# Altium PCB AC-Power-Monitor.PcbDoc (part 3 of 3)
Units mm, origin at the board's own origin, x right, y up, seen from the top; angles counter-clockwise.
Board outline 94 x 57 mm, 4 copper layers (Top Layer, N / GND, L / VCC, Bottom Layer), stack 0.673 mm thick; 70 components, 59 nets, 252 pads, 596 vias.
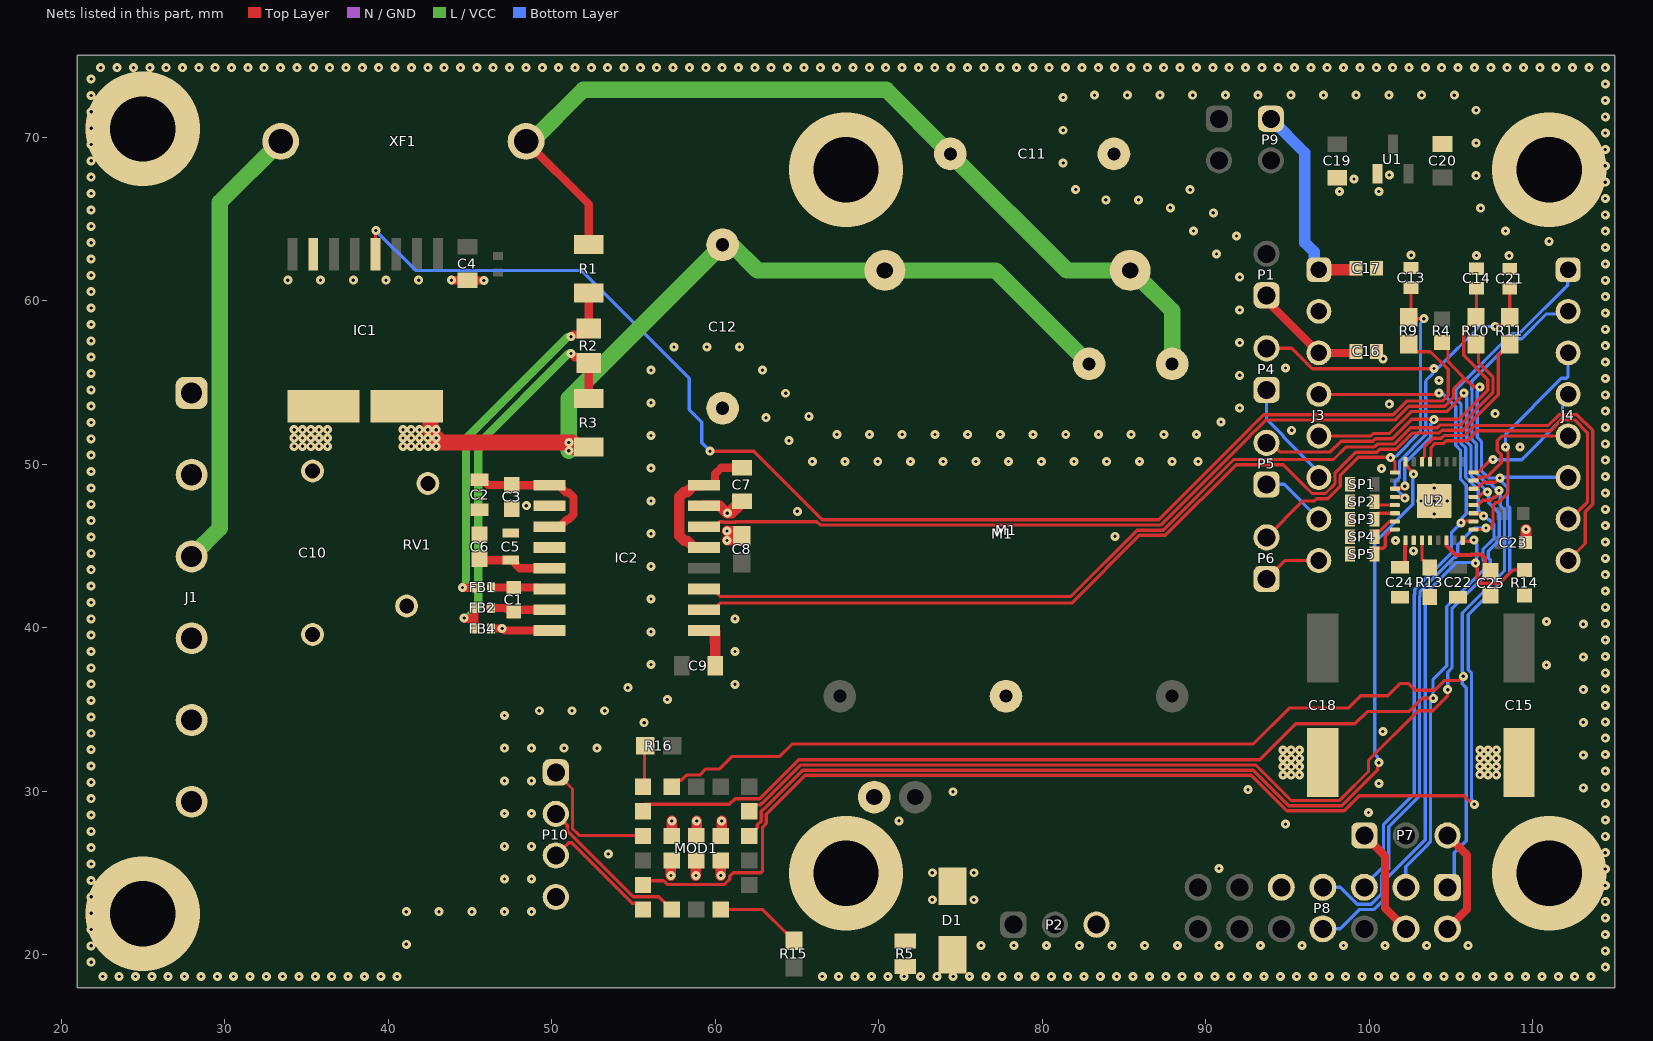
[diagram p4: the nets of this part, all layers, seen from the top]

## Via types
v1: diameter 0.55, hole 0.2, Top Layer to Bottom Layer, 445 vias
v2: diameter 0.55, hole 0.2, Top Layer to Bottom Layer, tented both sides, 145 vias
v3: diameter 7, hole 4, Top Layer to Bottom Layer, 6 vias

## Nets (pads, with @x,y where several pads share a name; then routed paths per layer and width w, separated by ;. In a path a pad name is that pad's centre, name@x,y a point inside that pad or via, vN(x,y) a via of type N, cw(c..) or ccw(c..) an arc to the next point about the centre after c; other vN are vias at no path point) (continued)
A0P: C13.1 P6.2 R9.2 U2.1 | length 23.3
  Top Layer w0.2: P6.2@93.718,45.528 95.942,47.752 96.647,47.752 96.784,47.889 97.453,47.889 98.215,48.651 98.215,49.32 99.314,50.419 101.27,50.419 v1(101.29,50.4) ; v1@101.32,50.36 101.573,50.108 U2.1@101.573,49.51 ; C13.1@102.552,60.797 102.552,59.115 R9.2@102.411,58.973 102.488,58.896 v1(103.332,58.896)
  Bottom Layer w0.2: v1(101.29,50.4) 101.357,50.467 101.604,50.467 103.124,51.987 103.124,58.604 103.332,58.812 v1(103.332,58.896)
A1N: C21.1 P4.2 R11.2 U2.4 | length 28.2
  Top Layer w0.2: P4.2@93.718,57.088 95.25,57.088 96.509,55.829 103.929,55.829 v1(103.955,55.855) ; U2.4@101.565,48.002 101.59,47.977 102.113,47.977 v1(102.167,47.923) ; v1(107.696,58.42) 107.791,58.42 107.877,58.506 108.154,58.506 108.585,58.937 R11.2@108.585,58.973 ; R11.2@108.585,59.01 C21.1@108.585,60.741
  Bottom Layer w0.2: v1(102.167,47.923) 102.167,47.954 101.575,48.546 101.575,48.945 101.847,49.217 101.847,50.193 103.444,51.79 103.444,55.045 103.465,55.066 103.465,55.122 103.888,55.545 103.888,55.788 104.022,55.922 104.24,55.922 106.738,58.42 v1(107.696,58.42)
A1P: C14.1 P5.2 R10.2 U2.3 | length 27.9
  Top Layer w0.2: P5.2@93.718,51.308 93.976,51.308 94.535,50.749 97.612,50.749 98.272,51.409 100.217,51.409 100.359,51.552 101.391,51.552 102.595,52.755 103.912,52.755 v1(103.942,52.726) ; U2.3@101.565,48.502 101.59,48.527 101.945,48.527 102.072,48.655 v1(102.167,48.655) ; v1@103.942,52.755 105.484,52.755 107.248,54.519 107.248,55.176 105.772,56.652 105.772,58.186 106.523,58.937 R10.2@106.523,58.973 ; R10.2@106.555,59.006 106.555,59.934 C14.1@106.555,60.759
  Bottom Layer w0.2: v1(102.167,48.655) 102.167,50.061 103.764,51.658 103.764,52.454 103.942,52.631 v1(103.942,52.726)
A2N: SP3.2 U2.6 | length 1.4
  Top Layer w0.16: SP3.2@100.318,46.736 100.318,46.802 SP3.2@100.338,46.822
  Top Layer w0.2: SP3.2@100.338,46.822 100.518,47.002 U2.6@101.565,47.002
A2P: SP2.2 U2.5 | length 1.4
  Top Layer w0.16: SP2.2@100.318,47.752 SP2.2@100.318,47.702 SP2.2@100.338,47.682
  Top Layer w0.2: SP2.2@100.338,47.682 100.518,47.502 U2.5@101.565,47.502
A3N: SP5.2 U2.8 | length 1.9
  Top Layer w0.2: SP5.2@100.509,44.85 100.513,44.854 100.863,44.854 100.98,44.971 100.98,45.608 101.349,45.977 101.54,45.977 U2.8@101.565,46.002
A3P: SP4.2 U2.7 | length 1.5
  Top Layer w0.2: SP4.2@100.318,45.866 100.372,45.92 100.663,45.92 101.22,46.477 101.54,46.477 U2.7@101.565,46.502
BOOT_CTRL0: MOD1.17 R15.1 | length 5.3
  Top Layer w0.2: MOD1.17@60.34,22.77 62.917,22.77 64.352,21.336 64.388,21.336 64.819,20.905 R15.1@64.819,20.868
BOOT_CTRL1: MOD1.9 R16.1 | length 2.1
  Top Layer w0.2: MOD1.9@55.678,30.7 55.678,32.721 R16.1@55.738,32.781
ESP_+3.3V: C16.2 J3.3 P1.1 | length 7.2
  Top Layer w0.5: P1.1@93.718,60.328 93.718,60.03 94.153,59.595 94.153,59.571 J3.3@96.915,56.809 99.11,56.809 C16.2@99.197,56.896
ESP_+5.0V: C17.2 J3.1 P9.1 | length 12.8
  Top Layer w0.7: J3.1@96.915,61.889 99.147,61.889 99.197,61.939 C17.2@99.197,61.976
  Bottom Layer w0.7: P9.1@93.98,71.12 96.064,69.036 96.064,63.542 96.625,62.982 96.625,62.179 J3.1@96.915,61.889
ESP_A0P: J3.8 P6.1 | length 3.7
  Top Layer w0.2: P6.1@93.718,42.988 94.839,44.109 J3.8@96.915,44.109
ESP_A1N: J3.6 P4.1 | length 6.7
  Bottom Layer w0.2: P4.1@93.718,54.548 93.718,52.75 94.738,51.73 94.738,51.693 96.915,49.516 J3.6@96.915,49.189
ESP_A1P: J3.7 P5.1 | length 4.1
  Bottom Layer w0.2: P5.1@93.718,48.768 94.796,48.768 J3.7@96.915,46.649
ESP_GPIO20: J4.7 U2.29 | length 17.3
  Top Layer w0.2: U2.29@103.715,50.152 103.74,50.177 103.74,50.431 103.772,50.463 103.772,51.005 104.038,51.271 104.544,51.271 104.708,51.435 105.974,51.435 106.588,52.049 111.089,52.049 111.749,52.709 112.561,52.709 113.334,51.936 113.334,47.675 112.308,46.649 J4.7@112.155,46.649
ESP_GPIO21: J4.8 U2.30 | length 21.1
  Top Layer w0.2: U2.30@103.215,50.152 103.215,50.327 103.24,50.352 103.253,50.352 103.37,50.469 103.37,51.056 103.905,51.591 104.412,51.591 104.576,51.755 105.841,51.755 106.456,52.369 110.957,52.369 111.617,53.029 112.693,53.029 113.654,52.068 113.654,47.543 113.199,47.087 113.199,45.153 J4.8@112.155,44.109
GND: C4.1 C7.1 C8.2 C9.1 C11.2 C12.2 C13.2 C14.2 C15.2 C16.1 C17.1 C18.2 C19.1 C20.1 C21.2 C22.1 C23.1 C24.1 C25.2 D1.2 IC1.9 IC2.9 IC2.15 J3.2 M1.4 MOD1.B1 MOD1.B2 MOD1.B3 MOD1.B4 MOD1.B5 MOD1.B6 P2.3 P8.9 P10.4 R5.2 R13.1 R14.1 SP1.1 SP2.1 SP3.1 SP4.1 SP5.1 U1.1 U2.10 U2.12 U2.33 | length 17.3
  Top Layer w0.5: v2(43.872,61.256) 43.881,61.247 44.868,61.247 44.876,61.239 v1(45.851,61.239)
  Top Layer w0.65: v1(57.293,24.848) 57.293,25.724 MOD1.B5@57.34,25.77 ; MOD1.B4@57.34,27.27 57.345,27.276 v1(57.345,28.186) ; v1(58.822,24.848) 58.822,25.753 MOD1.B6@58.84,25.77 ; MOD1.B3@58.84,27.27 58.84,27.42 58.865,27.445 58.865,28.182 v1(58.869,28.186) ; IC2.9@58.945,39.829 IC2.9@59.31,39.829 59.916,39.829 59.991,39.754 59.991,39.149 60.003,39.137 C9.1@60.003,37.671 ; IC2.15@59.31,47.449 60.276,47.449 60.723,47.002 61.012,47.002 C7.1@61.458,47.449 ; MOD1.B1@60.34,25.77 60.346,25.764 v1(60.346,24.848) ; MOD1.B2@60.34,27.27 60.34,27.386 60.398,27.445 v1(60.398,28.186) ; v1(60.73,45.34) 60.732,45.341 61.429,45.341 C8.2@61.638,45.55 ; v1(60.73,45.912) 60.745,45.898 61.429,45.898 C8.2@61.638,45.689 ; v1@60.784,47.002 61.36,47.579 61.485,47.579 C7.1@61.638,47.732 ; C14.2@106.555,61.959 C14.2@106.557,61.961 ; C21.2@108.555,61.971 C21.2@108.585,61.941 ; C23.1@109.541,45.212 109.541,45.249 109.579,45.287 v1(109.579,46.02)
  other v1: 73.279,23.368 75.819,23.368 73.279,25.019 75.819,25.019 53.467,26.162 94.716,30.998 95.219,30.998 95.727,30.998 106.758,31.013 107.258,31.008 107.766,31.008 94.716,31.506 95.219,31.506 95.727,31.506 106.758,31.516 107.258,31.516 107.766,31.516 94.716,32.014 95.219,32.014 95.727,32.014 106.758,32.024 107.258,32.024 107.766,32.024 94.716,32.522 95.219,32.522 95.727,32.522 106.769,32.512 107.258,32.532 107.766,32.532 102.707,44.704 101.6,45.339 103.965,46.952 60.746,47.002 103.165,47.752 103.965,47.752 104.765,47.752 103.965,48.552 100.741,49.729 109.22,51.054 95.25,52.07 107.696,53.086 101.219,53.674 104.267,55.118 94.869,55.88 100.847,56.446 106.557,62.761 108.555,62.751 102.563,62.781 98.171,66.675 100.584,66.675 99.06,67.437 101.219,67.691
  other v2: 76.265,20.574 78.265,20.574 80.265,20.574 82.265,20.574 84.265,20.574 86.265,20.574 88.265,20.574 90.805,20.574 93.345,20.574 95.885,20.574 98.425,20.574 100.965,20.574 103.505,20.574 106.045,20.574 48.768,22.639 48.768,24.639 90.805,25.273 48.768,26.639 94.869,27.989 71.247,28.194 48.768,28.639 99.949,28.702 74.549,29.972 92.583,30.099 113.084,30.216 100.584,30.48 48.768,30.639 113.084,32.216 48.768,32.639 50.768,32.639 52.768,32.639 100.825,33.655 55.66,34.197 113.084,34.216 57.075,35.612 113.084,36.216 61.214,36.544 110.834,37.719 113.084,38.216 61.214,38.544 113.084,40.216 110.834,40.386 61.214,40.544 84.455,45.593 65.024,47.117 65.942,50.169 67.942,50.169 69.942,50.169 71.942,50.169 73.942,50.169 75.942,50.169 77.942,50.169 79.942,50.169 81.942,50.169 83.942,50.169 85.942,50.169 87.942,50.169 89.535,50.165 64.516,51.435 63.102,52.849 33.872,61.256 35.872,61.256 37.872,61.256 39.872,61.256 41.872,61.256 110.998,63.627 91.873,63.956 108.331,64.262 90.458,65.371 106.807,65.659 89.044,66.785 106.536,67.644 106.536,69.644 106.536,71.644 83.199,72.565 85.199,72.565 87.199,72.565 89.199,72.565 91.199,72.565 93.199,72.565 95.199,72.565 97.199,72.565 99.199,72.565 101.199,72.565 103.199,72.565 105.199,72.565
GPIO3: J3.5 MOD1.4 U2.21 | length 79.5
  Top Layer w0.2: MOD1.4@62.09,28.77 62.479,29.16 62.724,29.16 62.794,29.23 62.848,29.23 65.23,31.613 93.04,31.613 95.21,29.444 98.191,29.444 98.32,29.573 98.32,29.582 99.949,31.21 99.949,31.888 102.986,34.925 103.886,34.925 104.776,35.815 104.776,36.204 v1(104.788,36.216) ; J3.5@96.915,51.729 100.084,51.729 100.227,51.872 101.203,51.872 102.552,53.221 104.737,53.221 105.781,54.265 v1(105.781,54.356) ; U2.21@106.365,48.002 106.39,48.027 106.716,48.027 106.919,48.229 107.15,48.229 v1(107.217,48.296)
  Bottom Layer w0.2: v1@104.788,36.311 104.788,37.278 105.049,37.539 105.049,41.167 107.398,43.516 107.398,44.151 107.277,44.272 107.277,44.682 107.947,45.352 107.947,46.993 107.295,47.645 v1@107.295,48.269 ; v1(105.781,54.356) 105.781,54.261 105.956,54.086 105.956,51.384 106.214,51.126 106.214,49.334 107.217,48.331 v1(107.217,48.296)
GPIO10: IC2.14 J4.6 MOD1.13 R4.1 U2.22 | length 146
  Top Layer w0.2: MOD1.13@55.59,24.27 55.845,24.526 56.844,24.526 57.067,24.303 60.572,24.303 60.891,24.622 60.891,24.81 61.1,25.019 62.781,25.019 62.898,25.136 62.898,27.815 63.13,28.047 63.13,28.607 65.496,30.973 92.775,30.973 94.945,28.804 98.457,28.804 98.613,28.96 99.377,29.724 105.785,29.724 106.155,29.354 106.179,29.354 106.326,29.207 v1(106.421,29.207) ; IC2.14@59.31,46.179 59.96,46.179 60.262,46.48 60.474,46.48 60.497,46.457 61.237,46.457 61.26,46.48 66.224,46.48 66.415,46.289 87.266,46.289 92.698,51.721 92.698,51.73 93.296,52.328 93.305,52.328 93.686,52.709 101.588,52.709 102.42,53.541 104.605,53.541 105.148,54.084 105.148,54.601 105.792,55.245 ; R4.1@104.442,57.443 104.445,57.443 104.813,57.075 104.813,56.265 105.148,55.929 105.812,55.265 106.346,54.731 106.747,54.731 v1(106.753,54.724) ; U2.22@106.365,48.502 106.39,48.527 106.613,48.527 106.981,48.895 107.688,48.895 107.956,49.163 v1(107.981,49.163)
  Bottom Layer w0.2: v1(106.421,29.207) 106.421,29.301 106.282,29.441 106.282,29.48 106.246,29.516 106.246,37.235 106.045,37.436 106.045,40.805 108.587,43.347 108.587,47.34 108.446,47.481 108.446,48.559 108.424,48.581 108.424,48.592 108.123,48.892 108.123,48.926 107.981,49.068 v1(107.981,49.163) ; v1(106.753,54.724) 106.753,54.63 106.596,54.472 106.596,51.649 106.854,51.391 106.854,49.599 107.291,49.163 v1(107.981,49.163) ; J4.6@112.143,49.202 108.019,49.202 v1(107.981,49.163)
HGND: C2.1 C3.2 C5.1 C6.2 FB4.2 IC2.2 IC2.8 | length 3.9
  Top Layer w0.5: C6.2@45.593,45.684 C6.2@45.692,45.783 ; C2.1@45.593,47.208 C2.1@45.656,47.271 ; FB4.2@46.283,39.954 v1(46.977,39.954) 46.991,39.954 47.116,39.829 IC2.8@49.86,39.829
  other v1: 48.453,47.466
L: C10.2 J1.3 J1.4 RV1.2 XF1.1 | length 27.6
  L / VCC w1: J1.3@27.984,44.359 29.709,46.084 29.709,53.359 29.709,55.359 29.709,66.013 XF1.1@33.434,69.738
Lfused: C11.1 M1.1 R1.2 XF1.2 | length 57.2
  Top Layer w0.5: XF1.2@48.434,69.738 52.274,65.898 R1.2@52.274,63.429
  L / VCC w1: XF1.2@48.434,69.738 48.772,69.738 51.932,72.898 70.458,72.898 C11.1@74.383,68.973 81.509,61.847 M1.1@85.377,61.847 ; M1.1@85.79,61.53 87.944,59.376 M1.1@87.944,56.134 M1.1@87.944,55.905
MOD1_RST: MOD1.3 U2.32 | length 62.5
  Top Layer w0.2: MOD1.3@62.09,27.27 62.578,27.759 62.578,27.948 62.81,28.179 62.81,28.793 62.927,28.91 62.98,28.91 65.363,31.293 92.908,31.293 95.077,29.124 98.324,29.124 100.517,31.317 100.517,31.683 v1(100.584,31.75) ; U2.32@102.215,50.152 102.215,49.977 102.24,49.952 102.253,49.952 102.37,49.835 102.37,49.79 102.694,49.466 v1(102.694,49.393)
  Bottom Layer w0.2: v1(100.584,31.75) 100.517,31.817 100.517,32.071 100.33,32.258 100.33,45.212 102.662,47.544 102.662,49.36 v1(102.694,49.393)
MOD1_U0RXD: MOD1.15 P10.2 | length 9.7
  Top Layer w0.2: P10.2@50.256,28.62 50.956,27.92 50.956,27.577 54.983,23.55 56.56,23.55 MOD1.15@57.34,22.77
MOD1_U0TXD: MOD1.14 P10.3 | length 7.3
  Top Layer w0.2: P10.3@50.256,26.08 50.289,26.08 51.059,26.849 51.224,26.849 54.923,23.151 55.209,23.151 MOD1.14@55.59,22.77
N: C10.1 C12.1 IC1.2 J1.2 M1.2 R3.1 RV1.1 | length 54.7
  Top Layer w1: IC1.2@41.138,53.538 41.845,53.538 42.595,52.788 v1@42.595,52.081 ; v1(42.938,51.604) 43.211,51.331 v1(51.05,51.331) ; v1@51.25,51.331 v1(51.05,51.331) ; R3.1@52.274,51.056 51.326,51.056 v1(51.05,51.331)
  N / GND w0.5: v1(51.05,50.823) v1(51.05,51.331)
  L / VCC w1: v1(51.05,50.823) v1(51.05,51.331) 51.05,54.018 C12.1@60.452,63.42 ; C12.1@60.984,63.447 62.584,61.847 M1.2@70.377,61.847 77.151,61.847 M1.2@82.864,56.134
  Bottom Layer w0.5: v1(51.05,50.823) v1(51.05,51.331)
  other v1: 40.906,51.096 41.414,51.096 41.922,51.096 42.43,51.096 42.938,51.096 40.906,51.604 41.414,51.604 41.922,51.604 42.43,51.604 40.906,52.112 41.414,52.112 41.922,52.112 42.43,52.112 42.938,52.112
NC1: IC2.4
NetC1_1: C1.1 FB1.2 IC2.6 | length 3.6
  Top Layer w0.5: FB1.2@46.285,42.462 49.119,42.46 49.21,42.369 IC2.6@49.86,42.369
NetC1_2: C1.2 FB2.2 IC2.7 | length 3.7
  Top Layer w0.5: FB2.2@46.28,41.208 47.192,41.208 47.29,41.11 47.535,41.11 C1.2@47.685,40.96 47.824,41.099 IC2.7@49.86,41.099
NetC2_2: C2.2 C3.1 IC2.1 IC2.3 | length 9.1
  Top Layer w0.5: C2.2@45.593,49.058 45.768,49.058 46.104,48.722 C3.1@47.561,48.722 47.565,48.719 IC2.1@49.86,48.719 50.51,48.719 50.585,48.644 50.585,48.567 50.878,48.274 51.042,48.274 51.335,47.981 51.335,46.917 51.042,46.624 50.942,46.624 50.585,46.267 50.585,46.254 50.51,46.179 IC2.3@49.86,46.179
NetC5_2: C5.2 C6.1 IC2.5 | length 4.6
  Top Layer w0.5: C6.1@45.593,44.232 45.692,44.133 C5.2@47.498,44.133 47.723,44.133 47.751,44.105 47.751,43.932 48.044,43.639 IC2.5@49.86,43.639
NetC7_2: C7.2 IC2.13 IC2.16 | length 9.1
  Top Layer w0.5: IC2.16@59.31,48.719 59.916,48.719 59.991,48.794 59.991,49.399 60.373,49.782 C7.2@61.638,49.782
  Top Layer w0.65: IC2.13@59.31,44.909 58.66,44.909 58.66,44.948 58.28,45.329 58.118,45.329 57.81,45.637 57.81,47.992 58.118,48.299 58.28,48.299 58.66,48.68 58.66,48.719 IC2.16@59.31,48.719
NetIC1_6: IC1.6 R9.1 | length 84
  Top Layer w0.2: IC1.6@39.233,62.838 39.229,62.842 39.229,64.268 v1(39.246,64.286) ; v1(59.69,50.8) 62.357,50.8 66.548,46.609 87.133,46.609 92.378,51.854 92.378,51.863 93.163,52.648 93.172,52.648 93.553,53.029 101.456,53.029 102.287,53.861 104.472,53.861 104.828,54.217 104.828,55.797 103.741,56.884 102.842,56.884 102.411,57.315 R9.1@102.411,57.343
  Bottom Layer w0.2: v1(39.246,64.286) 41.682,61.849 51.816,61.849 58.42,55.245 58.42,53.34 59.182,52.578 59.182,51.308 v1(59.69,50.8)
NetIC2_10: IC2.10 R11.1 | length 59.3
  Top Layer w0.2: IC2.10@59.31,41.099 59.96,41.099 60.185,41.324 60.185,41.393 60.302,41.51 81.8,41.51 85.939,45.649 87.531,45.649 91.85,49.968 94.75,49.968 95.935,48.783 96.509,48.209 97.321,48.209 97.895,48.783 97.895,49.453 99.181,50.739 100.451,50.739 100.624,50.912 101.657,50.912 102.656,51.911 104.279,51.911 104.443,52.075 105.709,52.075 107.888,54.254 107.888,56.646 108.117,56.875 108.154,56.875 108.585,57.306 R11.1@108.585,57.343
NetIC2_11: IC2.11 R10.1 | length 57.1
  Top Layer w0.2: IC2.11@59.31,42.369 59.96,42.369 60.185,42.144 60.185,42.027 60.302,41.91 81.747,41.91 85.806,45.969 87.398,45.969 91.717,50.288 97.81,50.288 98.581,51.059 100.319,51.059 100.492,51.232 101.524,51.232 102.523,52.231 104.147,52.231 104.311,52.395 105.576,52.395 107.568,54.387 107.568,55.308 106.68,56.197 106.68,57.185 R10.1@106.523,57.343
NetMOD1_11: MOD1.11 P10.1 | length 8
  Top Layer w0.2: P10.1@50.256,31.16 51.276,30.14 51.276,27.71 51.686,27.3 55.161,27.3 MOD1.11@55.278,27.3
Nout: IC1.1 J1.1
  other v1: 34.258,51.096 34.766,51.096 35.274,51.096 35.782,51.096 36.29,51.096 34.258,51.604 34.766,51.604 35.274,51.604 35.782,51.604 36.29,51.604 34.258,52.112 34.766,52.112 35.274,52.112 35.782,52.112 36.29,52.112
PE: D1.1 J1.5 J1.6 R5.1
  other v1: 22.554,18.669 23.554,18.669 24.554,18.669 25.554,18.669 26.554,18.669 27.554,18.669 28.554,18.669 29.554,18.669 30.554,18.669 31.554,18.669 32.554,18.669 33.554,18.669 34.554,18.669 35.554,18.669 36.554,18.669 37.554,18.669 38.554,18.669 39.554,18.669 40.554,18.669 66.554,18.669 67.554,18.669 68.554,18.669 69.554,18.669 70.554,18.669 71.554,18.669 72.554,18.669 73.554,18.669 74.554,18.669 75.554,18.669 76.554,18.669 77.554,18.669 78.554,18.669 79.554,18.669 80.554,18.669 81.554,18.669 82.554,18.669 83.554,18.669 84.554,18.669 85.554,18.669 86.554,18.669 87.554,18.669 88.554,18.669 89.554,18.669 90.554,18.669 91.554,18.669 92.554,18.669 93.554,18.669 94.554,18.669 95.554,18.669 96.554,18.669 97.554,18.669 98.554,18.669 99.554,18.669 100.554,18.669 101.554,18.669 102.554,18.669 103.554,18.669 104.554,18.669 105.554,18.669 106.554,18.669 107.554,18.669 108.554,18.669 109.554,18.669 110.554,18.669 111.554,18.669 112.554,18.669 113.554,18.669 114.427,19.246 21.844,19.549 114.427,20.246 21.844,20.549 114.427,21.246 21.844,21.549 114.427,22.246 21.844,22.549 114.427,23.246 21.844,23.549 114.427,24.246 21.844,24.549 114.427,25.246 21.844,25.549 114.427,26.246 21.844,26.549 114.427,27.246 21.844,27.549 114.427,28.246 21.844,28.549 114.427,29.246 21.844,29.549 114.427,30.246 21.844,30.549 114.427,31.246 21.844,31.549 114.427,32.246 21.844,32.549 114.427,33.246 21.844,33.549 114.427,34.246 21.844,34.549 114.427,35.246 21.844,35.549 114.427,36.246 21.844,36.549 114.427,37.246 21.844,37.549 114.427,38.246 21.844,38.549 114.427,39.246 21.844,39.549 114.427,40.246 21.844,40.549 114.427,41.246 21.844,41.549 114.427,42.246 21.844,42.549 114.427,43.246 21.844,43.549 114.427,44.246 21.844,44.549 114.427,45.246 21.844,45.549 114.427,46.246 21.844,46.549 114.427,47.246 21.844,47.549 114.427,48.246 21.844,48.549 114.427,49.246 21.844,49.549 114.427,50.246 21.844,50.549 114.427,51.246 21.844,51.549 114.427,52.246 21.844,52.549 114.427,53.246 21.844,53.549 114.427,54.246 21.844,54.549 114.427,55.246 21.844,55.549 114.427,56.246 21.844,56.549 114.427,57.246 21.844,57.549 114.427,58.246 21.844,58.549 114.427,59.246 21.844,59.549 114.427,60.246 21.844,60.549 114.427,61.246 21.844,61.549 114.427,62.246 21.844,62.549 114.427,63.246 21.844,63.549 114.427,64.246 21.844,64.549 114.427,65.246 21.844,65.549 114.427,66.246 21.844,66.549 114.427,67.246 21.844,67.549 114.427,68.246 21.844,68.549 114.427,69.246 21.844,69.549 114.427,70.246 21.844,70.549 114.427,71.246 21.844,71.549 114.427,72.246 21.844,72.549 114.427,73.246 21.844,73.549 22.427,74.246 23.427,74.246 24.427,74.246 25.427,74.246 26.427,74.246 27.427,74.246 28.427,74.246 29.427,74.246 30.427,74.246 31.427,74.246 32.427,74.246 33.427,74.246 34.427,74.246 35.427,74.246 36.427,74.246 37.427,74.246 38.427,74.246 39.427,74.246 40.427,74.246 41.427,74.246 42.427,74.246 43.427,74.246 44.427,74.246 45.427,74.246 46.427,74.246 47.427,74.246 48.427,74.246 49.427,74.246 50.427,74.246 51.427,74.246 52.427,74.246 53.427,74.246 54.427,74.246 55.427,74.246 56.427,74.246 57.427,74.246 58.427,74.246 59.427,74.246 60.427,74.246 61.427,74.246 62.427,74.246 63.427,74.246 64.427,74.246 65.427,74.246 66.427,74.246 67.427,74.246 68.427,74.246 69.427,74.246 70.427,74.246 71.427,74.246 72.427,74.246 73.427,74.246 74.427,74.246 75.427,74.246 76.427,74.246 77.427,74.246 78.427,74.246 79.427,74.246 80.427,74.246 81.427,74.246 82.427,74.246 83.427,74.246 84.427,74.246 85.427,74.246 86.427,74.246 87.427,74.246 88.427,74.246 89.427,74.246 90.427,74.246 91.427,74.246 92.427,74.246 93.427,74.246 94.427,74.246 95.427,74.246 96.427,74.246 97.427,74.246 98.427,74.246 99.427,74.246 100.427,74.246 101.427,74.246 102.427,74.246 103.427,74.246 104.427,74.246 105.427,74.246 106.427,74.246 107.427,74.246 108.427,74.246 109.427,74.246 110.427,74.246 111.427,74.246 112.427,74.246 113.427,74.246 114.427,74.246
  other v2: 41.117,20.639 41.117,22.639 43.117,22.639 45.117,22.639 47.117,22.639 47.117,24.639 47.117,26.639 47.117,28.639 47.117,30.639 47.117,32.639 47.117,34.639 49.244,34.925 51.244,34.925 53.244,34.925 54.658,36.339 56.072,37.753 56.072,39.753 56.072,41.753 56.072,43.753 56.072,45.753 56.072,47.753 56.072,49.753 56.072,51.753 67.437,51.816 69.437,51.816 71.437,51.816 73.437,51.816 75.437,51.816 77.437,51.816 79.437,51.816 81.437,51.816 83.437,51.816 85.437,51.816 87.437,51.816 89.437,51.816 90.932,52.578 65.729,52.925 92.075,53.435 56.072,53.753 64.315,54.339 92.075,55.435 56.072,55.753 62.901,55.753 57.487,57.168 59.487,57.168 61.487,57.168 92.075,57.435 92.075,59.435 92.075,61.435 90.661,62.849 89.247,64.263 87.832,65.678 83.884,66.167 85.884,66.167 82.042,66.802 81.28,68.421 81.28,70.421 81.28,72.421
  other v3: 25,22.5 68,25 111,25 68,68 111,68 25,70.5
ROSC: R13.2 U2.11 | length 1.9
  Top Layer w0.2: U2.11@103.215,45.352 103.215,44.199 103.332,44.082 103.351,44.082 103.701,43.732 R13.2@103.701,43.682
RXD/TDI/MISO: J4.1 MOD1.10 P8.3 U2.19 | length 95.9
  Top Layer w0.2: MOD1.10@55.678,29.2 60.867,29.2 61.217,29.55 62.715,29.55 65.098,31.933 93.296,31.933 95.494,34.132 99.116,34.132 99.862,34.877 102.423,34.877 103.233,35.687 v1(103.912,35.686) ; U2.19@106.365,47.002 106.39,46.977 106.753,46.977 106.897,46.833 v1(106.991,46.833)
  Bottom Layer w0.2: P8.3@102.235,24.13 102.235,25.387 103.575,26.727 103.575,26.75 103.737,26.912 103.737,35.417 103.912,35.592 v1(103.912,35.686) 103.898,35.7 103.898,36.841 104.729,37.671 104.729,41.299 107.078,43.649 107.078,44.018 106.957,44.14 106.957,44.815 107.627,45.485 107.627,46.306 107.337,46.596 107.284,46.596 107.046,46.833 v1(106.991,46.833) 106.652,47.172 106.652,48.444 105.894,49.202 105.894,50.993 105.603,51.285 105.603,53.687 105.296,53.994 105.296,54.141 105.286,54.151 105.286,54.561 108.719,57.994 109.175,57.994 112.127,60.946 112.127,61.862 J4.1@112.155,61.889
SCL: J4.5 U2.23 | length 8.1
  Top Layer w0.2: U2.23@106.365,49.002 106.39,49.027 106.565,49.027 106.695,49.157 106.727,49.157 106.777,49.207 106.81,49.207 106.818,49.215 107.192,49.215 108.064,50.087 108.064,50.577 107.823,50.818 107.823,51.435 108.117,51.729 J4.5@112.155,51.729
SDA: J4.4 U2.24 | length 8.5
  Top Layer w0.2: U2.24@106.365,49.502 106.39,49.527 106.677,49.527 107.375,50.225 107.502,50.225 v1(107.569,50.292)
  Bottom Layer w0.2: v1(107.569,50.292) 107.582,50.279 109.319,50.279 111.809,52.769 111.809,53.566 112.155,53.912 J4.4@112.155,54.269
TCK/SS: J4.3 P8.7 U2.17 | length 44
  Top Layer w0.2: U2.17@106.365,46.002 106.938,46.002 107.037,46.101 v1(107.132,46.101) ; v1@107.132,46.002 107.231,46.101 107.448,46.101 ; 107.461,46.088 107.515,46.141 107.515,46.343 107.565,46.393 107.565,47.487 107.732,47.654 107.896,47.654 108.476,48.234 108.476,50.815 108.331,50.959 v1(108.331,51.054)
  Bottom Layer w0.2: P8.7@97.155,24.13 98.217,24.13 99.262,23.085 100.128,23.085 100.74,23.697 100.74,24.82 101.19,25.27 101.19,27.839 103.074,29.724 103.074,41.9 103.097,41.922 103.097,42.208 105.204,44.316 105.281,44.316 105.398,44.433 105.398,44.571 105.41,44.582 105.41,44.847 105.41,45.085 106.426,46.101 v1(107.132,46.101) ; v1(108.331,51.054) 108.331,51.831 111.749,55.249 112.038,55.249 112.155,55.366 J4.3@112.155,56.809
TEST: P8.8 R14.2 U2.16 | length 34.8
  Top Layer w0.2: U2.16@105.715,45.352 105.715,45.315 105.74,45.29 106.22,45.29 106.297,45.367 v1(106.392,45.367) ; v1(106.485,43.947) 106.552,43.88 106.552,43.696 106.594,43.655 106.594,42.847 106.711,42.729 107.985,42.729 108.782,43.527 R14.2@109.498,43.527
  Bottom Layer w0.2: P8.8@97.155,21.59 98.217,21.59 99.392,22.765 100.26,22.765 101.06,23.565 101.06,24.688 103.417,27.044 103.417,42.076 105.337,43.996 106.437,43.996 v1(106.485,43.947) ; v1(106.392,45.367) 106.392,45.272 106.563,45.101 106.563,44.28 106.552,44.27 106.552,44.063 v1@106.485,43.996
TMS/SCK: J3.4 P8.5 U2.18 | length 41.8
  Top Layer w0.2: J3.4@96.915,54.269 103.975,54.269 103.995,54.289 104.2,54.289 v1(104.267,54.356) ; v1(105.608,46.413) 105.702,46.413 105.816,46.527 106.34,46.527 U2.18@106.36,46.507
  Bottom Layer w0.2: P8.5@99.695,24.13 99.695,24.253 100.87,25.428 100.87,27.972 102.754,29.856 102.754,42.032 102.777,42.055 102.777,42.341 105.029,44.593 105.029,45.834 105.675,46.48 105.675,46.73 105.92,46.976 105.92,48.723 105.574,49.069 105.574,50.861 105.283,51.152 105.283,53.527 104.521,54.289 104.334,54.289 v1(104.267,54.356)
TXD/TDO/MOSI: J4.2 MOD1.8 P8.1 U2.20 | length 94.8
  Top Layer w0.2: MOD1.8@57.34,30.27 57.74,30.67 57.928,30.67 58.12,30.862 58.248,30.99 59.057,30.99 59.436,31.369 60.291,31.369 61.053,32.131 63.938,32.131 64.7,32.893 92.898,32.893 95.097,35.092 98.719,35.092 99.464,35.837 101.121,35.837 101.871,36.586 102.414,36.586 102.818,36.181 104.003,36.181 104.589,36.768 105.457,36.768 105.721,37.032 v1(105.749,37.032) ; U2.20@106.365,47.502 106.39,47.527 106.669,47.527 106.943,47.801 107.422,47.801 107.447,47.826 107.451,47.826 107.599,47.974 107.694,47.974 107.862,48.141 107.862,48.32 v1(107.929,48.387)
  Bottom Layer w0.2: P8.1@104.775,24.13 105.197,24.552 105.197,26.249 105.926,26.978 105.926,36.336 105.681,36.581 105.681,36.74 105.682,36.965 v1(105.749,37.032) ; v1@105.711,37.099 105.711,37.302 105.689,37.324 105.689,40.901 108.267,43.48 108.267,47.208 107.998,47.476 107.998,48.095 107.996,48.097 107.996,48.32 v1(107.929,48.387) 107.839,48.387 107.383,48.843 107.158,48.843 106.534,49.467 106.534,51.258 106.276,51.517 106.276,54.543 106.258,54.561 106.258,55.071 108.861,57.674 109.307,57.674 110.818,59.185 111.99,59.185 J4.2@112.155,59.349
VCC_TARGET: P7.1 P8.4 | length 6.8
  Top Layer w0.5: P7.1@99.695,27.305 100.965,26.035 100.965,22.86 P8.4@102.235,21.59
VCC_TOOL: P7.3 P8.2 | length 6.7
  Top Layer w0.5: P8.2@104.775,21.59 105.97,22.785 105.97,26.11 P7.3@104.775,27.305
VCORE: C25.1 U2.14 | length 4
  Top Layer w0.25: U2.14@104.715,45.352 104.715,45.025 105.167,44.573 105.29,44.45 106.222,44.45 106.239,44.467 106.86,44.467 107.07,44.257 107.07,43.797 C25.1@107.414,43.453
VN: FB2.1 FB4.1 R2.1 R3.2 | length 24.5
  Top Layer w0.5: v1(44.651,40.595) 44.665,40.595 44.706,40.555 45.283,40.555 FB4.1@45.283,39.954 ; 45.28,40.555 FB2.1@45.28,41.208 ; v1(51.181,56.769) 51.195,56.769 51.419,56.545 51.921,56.545 R2.1@52.274,56.191 R3.2@52.274,54.007
  L / VCC w0.5: v1(44.651,40.595) 44.661,40.605 44.856,40.605 45.513,41.261 45.513,51.228 51.044,56.759 51.171,56.759 v1(51.181,56.769)
VP: FB1.1 R1.1 R2.2 | length 22.4
  Top Layer w0.5: v1(44.55,42.46) 44.564,42.46 44.578,42.446 45.285,42.446 FB1.1@45.285,42.462 ; v1(51.191,57.795) 51.204,57.795 51.349,57.94 51.921,57.94 R2.2@52.274,58.293 R1.1@52.274,60.478
  L / VCC w0.5: v1(44.55,42.46) 44.55,42.473 44.755,42.677 44.755,50.978 44.763,50.986 44.763,51.574 50.974,57.785 51.181,57.785 v1(51.191,57.795)
VREF: C24.2 U2.9 | length 1.8
  Top Layer w0.25: C24.2@101.873,43.707 101.934,43.707 102.187,43.96 102.187,44.982 102.215,45.01 U2.9@102.215,45.352
pads on no net: IC1.3 IC1.5 IC1.7 IC1.8 IC1.10 M1.NC MOD1.1 MOD1.2 MOD1.12 MOD1.16 P8.6 P8.10 P8.12 P8.13 P8.14 U2.25 U2.31

## Polygon pours and split planes (outlines as drawn)
GND on Top Layer "GND_L01_P009" (solid, remove dead copper, pour order 9): 90.297,50.8 92.964,53.467 92.964,62.103 87.757,67.31 83.439,67.31 82.296,68.453 82.296,73.152 106.045,73.152 107.231,71.966 107.231,68.029 111.012,64.248 113.792,64.248 113.792,28.755 110.67,28.755 107.231,25.316 107.231,19.939 71.776,19.939 71.776,25 64.228,25 64.228,19.939 48.006,19.939 48.006,34.036 54.356,34.036 56.896,36.576 56.896,49.022 57.277,49.403 57.277,54.991 57.912,55.626 61.214,55.626 66.04,50.8
N on Top Layer "N_L01_P044" (solid, pour order 44): 38.933,54.538 43.343,54.538 43.343,50.859 43.402,50.8 38.957,50.8
GND on Top Layer "GND_L01_P010" (solid, pour order 10): 47.371,60.452 33.401,60.452 33.401,64.008 33.718,64.325 35.877,64.325 36.957,65.405 45.212,65.405 47.371,63.246
PE on Top Layer "PE_L01_P045" (solid, pour order 45): 21.151,75.281 115.151,75.281 115.151,18.281 21.151,18.281
HGND on Top Layer "HGND_L01_P026" (solid, pour order 26): 44.831,48.006 51.054,48.006 51.054,44.704 44.831,44.704
Nout on Top Layer "NOUT_L01_P042" (solid, pour order 42): 33.853,54.538 38.263,54.538 38.263,50.859 38.322,50.8 33.877,50.8
+3.3V on Top Layer "+3.3V_L01_P007" (solid, pour order 7): 106.377,40.864 110.116,40.864 110.116,36.664 106.377,36.664
+5.0V on Top Layer "+5.0V_L01_P008" (solid, pour order 8): 94.361,40.864 97.96,40.864 97.96,36.664 94.361,36.664
PE on Top Layer "PE_L01_P022" (solid, pour order 22): 68,21.5 cw(c68,25) 64.5,25 cw(c68,25) 68,28.5 cw(c68,25) 71.5,25 cw(c68,25)
+5.0V on L / VCC "+5.0V_L03_P048" (solid, pour order 48): 94.229,39.995 96.388,39.995 96.388,37.455 94.229,37.455
N on L / VCC "N_L03_P040" (solid, pour order 40): 40.635,50.819 40.635,52.376 43.224,52.376 43.224,50.819
+3.3V on L / VCC "+3.3V_L03_P031" (solid, pour order 31): 90.297,50.8 92.964,53.467 92.964,62.103 87.757,67.31 83.439,67.31 82.296,68.453 82.296,73.152 106.045,73.152 107.231,71.966 107.231,67.775 110.808,64.198 113.792,64.198 113.792,28.788 110.703,28.788 107.231,25.316 107.231,19.939 67.31,19.939 66.548,19.177 64.897,19.177 64.135,19.939 48.006,19.939 48.006,34.036 54.356,34.036 56.896,36.576 56.896,54.61 57.912,55.626 61.214,55.626 66.04,50.8
PE on L / VCC "PE_L03_P047" (solid, pour order 47): 21,75 115,75 115,18 21,18
Nout on L / VCC "NOUT_L03_P046" (solid, pour order 46): 33.987,50.819 33.987,52.376 36.576,52.376 36.576,50.819
GND on L / VCC "GND_L03_P038" (solid, pour order 38): 94.107,33.005 96.266,33.005 96.266,30.465 94.107,30.465
GND on L / VCC "GND_L03_P033" (solid, pour order 33): 106.263,33.005 108.422,33.005 108.422,30.465 106.263,30.465
L on L / VCC "L_L03_P034" (solid, pour order 34): 25.368,46.736 42.926,46.736 42.926,37.592 25.368,37.592
N on N / GND "N_L02_P041" (solid, pour order 41): 40.635,50.819 40.635,52.376 43.224,52.376 43.224,50.819
N on N / GND "N_L02_P014" (solid, pour order 14): 43.402,56.896 44.069,56.229 44.069,45.847 25.368,45.847 25.368,50.546 38.933,50.546 38.933,56.896
GND on N / GND "GND_L02_P013" (solid, pour order 13): 90.297,50.8 92.964,53.467 92.964,62.103 87.757,67.31 83.439,67.31 82.296,68.453 82.296,73.152 106.045,73.152 107.231,71.966 107.231,67.902 110.907,64.226 113.792,64.226 113.792,28.755 110.83,28.755 107.231,25.157 107.231,19.939 48.006,19.939 48.006,34.036 54.356,34.036 56.896,36.576 56.896,51.816 52.451,51.816 51.244,53.023 43.815,60.452 33.401,60.452 33.401,63.958 34.848,65.405 51.435,65.405 58.42,58.42 66.04,50.8
PE on N / GND "PE_L02_P043" (solid, pour order 43): 21.058,75.027 115.058,75.027 115.058,18.027 21.058,18.027
+3.3V on N / GND "+3.3V_L02_P037" (solid, pour order 37): 106.263,40.005 108.422,40.005 108.422,37.465 106.263,37.465
+5.0V on N / GND "+5.0V_L02_P030" (solid, pour order 30): 94.107,40.005 96.266,40.005 96.266,37.465 94.107,37.465
Nout on N / GND "NOUT_L02_P015" (solid, pour order 15): 25.368,50.8 38.576,50.8 38.576,56.896 25.368,56.896
PE on N / GND "PE_L02_P023" (solid, pour order 23): 23.368,37.592 29.972,37.592 29.972,26.924 23.368,26.924
HGND on N / GND "HGND_L02_P028" (solid, pour order 28): 44.323,49.784 52.324,49.784 52.324,37.846 44.323,37.846
N on Bottom Layer "N_L04_P035" (solid, pour order 35): 40.635,50.819 40.635,52.376 43.224,52.376 43.224,50.819
GND on Bottom Layer "GND_L04_P012" (solid, pour order 12): 90.297,50.8 92.964,53.467 92.964,62.103 87.757,67.31 83.439,67.31 82.296,68.453 82.296,73.152 106.045,73.152 107.231,71.966 107.231,68.022 111.027,64.226 113.792,64.226 113.792,28.775 110.944,28.775 107.231,25.062 107.231,19.939 71.77,19.939 71.77,25 64.225,25 64.225,19.939 48.006,19.939 48.006,34.036 54.356,34.036 56.896,36.576 56.896,54.61 57.912,55.626 61.214,55.626 66.04,50.8
PE on Bottom Layer "PE_L04_P017" (solid, pour order 17): 21,75 115,75 115,18 21,18
Nout on Bottom Layer "NOUT_L04_P039" (solid, pour order 39): 33.987,50.819 33.987,52.376 36.576,52.376 36.576,50.819
+5.0V on Bottom Layer "+5.0V_L04_P032" (solid, pour order 32): 94.107,40.005 96.266,40.005 96.266,37.465 94.107,37.465
+3.3V on Bottom Layer "+3.3V_L04_P029" (solid, pour order 29): 106.172,40.005 108.331,40.005 108.331,37.465 106.172,37.465

## Silkscreen, mask and mechanical layers (free items; w line width, h text height)
Top Overlay:
  drawing of 78 lines, arcs and shapes, not listed
  text "Fuse: / 1.5A (T)" at 54.102,67.448 h2
  text "<" at 21.99,53.652 h2
  text "N" at 22.09,52.364 h2 r270
  text "<" at 23.562,50.037 h2 r180
  text "L" at 22.09,42.26 h2 r270
  text "WLAN Power-Meter" at 33.448,34.956 h3
  text "PE" at 22.09,32.936 h2 r270
  text "designed for:" at 33.448,27.695 h1.4
  text "Rev." at 41.91,21.605 h1.5
  text "A 1" at 44.958,21.59 h2
Top Solder:
  region: 41.783,18 41.783,21.336 53.721,21.336 53.721,18
Mechanical 1:
  the board outline again, w0.2

## Text inside footprints (layer, text, board x,y; h text height)
C15: Top Overlay "+" at 105.797,38.983 h1.2 r90
C18: Top Overlay "+" at 93.859,38.983 h1.2 r90
M1: Top Overlay "~" at 82.417,57.185 h2; Top Overlay "~" at 87.497,57.185 h2; Top Overlay "+" at 87.522,33.467 h2; Top Overlay "-" at 77.541,33.634 h2
MOD1: Mechanical 2 "no metal" at 41.964,19.652 h0.89; Mechanical 2 "12.5mm" at 48.685,18.29 h0.89; Mechanical 2 "12.5mm" at 59.339,14.271 h0.89 r90; Mechanical 2 "no metal" at 60.139,7.771 h0.89 r90